# Altium PCB PCB.PcbDoc
Units mm, origin at the board's own origin, x right, y up, seen from the top; angles counter-clockwise.
Board outline 10.67 x 10.41 mm, 2 copper layers (Top Layer, Bottom Layer); 8 components, 8 nets, 30 pads, 0 vias.
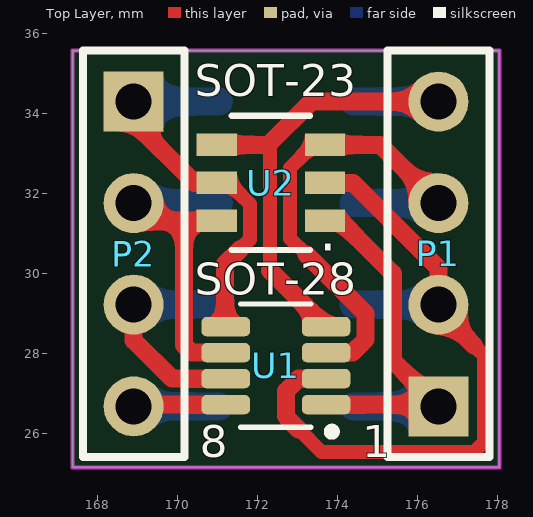
[diagram p0: Top Layer view]
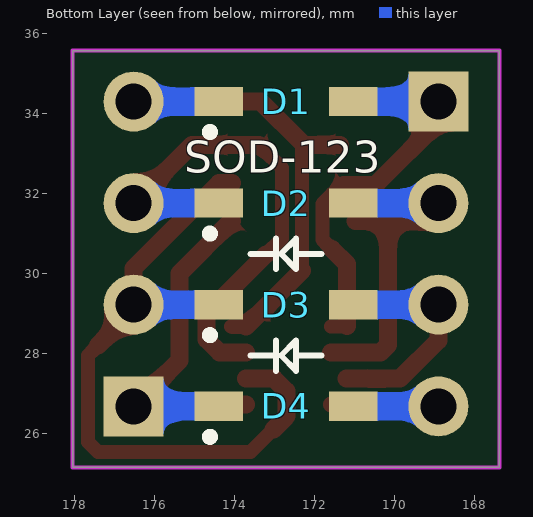
[diagram p1: Bottom Layer view, seen from below]
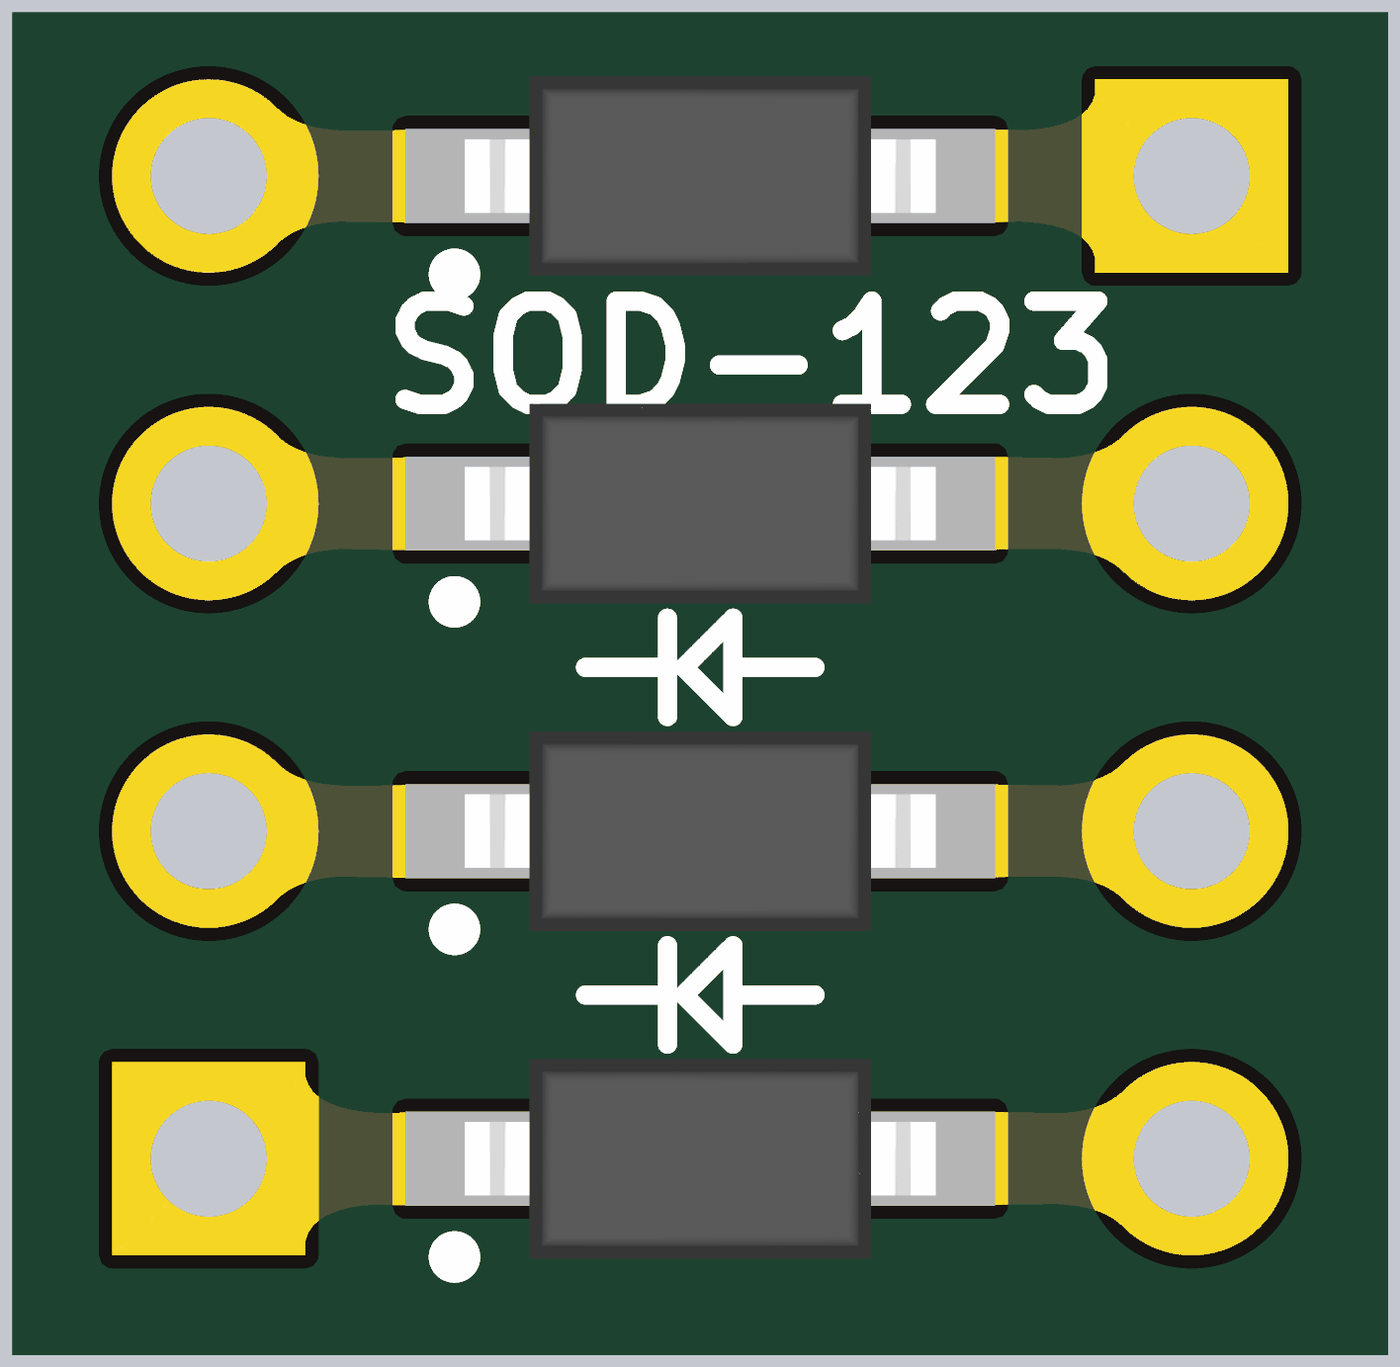
[diagram p2: 3D render of the assembled board from below, using the file's embedded part models]

## Layer stack, top to bottom
Top Solder: solder mask 0.0102, Solder Resist, Dk 3.5
Top Layer: signal copper 0.0356
Dielectric 1: dielectric 0.32, FR-4, Dk 4.8
Bottom Layer: signal copper 0.0356
Bottom Solder: solder mask 0.0102, Solder Resist, Dk 3.5

## Board outline
167.386,35.56 178.054,35.56 178.054,25.146 167.386,25.146

## Design rules (kind name [scope] priority, off if disabled: settings)
Clearance [All] p1: gap=0.152 ignorepadtopadclearanceinfootprint=FALSE except(0: Arc-Hole Track-Hole SMDPad-Hole THPad-Hole Via-Hole Fill-Hole Poly-Hole Region-Hole Text-Hole)
HoleSize [All] p1: absolutevalues=TRUE maxlimit=3 minlimit=0.3 maxpercent=80.000 minpercent=20.000
PolygonConnect [All] p1: connectstyle=Relief reliefconductorwidth=0.254 reliefentries=4 polygonreliefangle="90 Angle" airgapwidth=0.254
RoutingVias [All] p1: holewidth=0.3 width=0.6 viastyle="Through Hole" minholewidth=0.3 minwidth=0.5 maxholewidth=1 maxwidth=5
SolderMaskExpansion [All] p1: expansion=0.102
Width [All] p1: maxlimit=25.4 minlimit=0.152 preferedwidth=0.152
29 further rules are at their usual default settings.

## Components (designator, comment, footprint, x,y, rotation, side; value= is the part's Value field where it differs from the comment)
D1 "1N5819HW-7-F" SOD3715X145N 172.72,34.29 r180 bottom
D2 "1N5819HW-7-F" SOD3715X145N 172.72,31.75 r180 bottom
D3 "1N5819HW-7-F" SOD3715X145N 172.72,29.21 r180 bottom
D4 "1N5819HW-7-F" SOD3715X145N 172.72,26.67 r180 bottom
P1 "Header 4" HDR1X4 176.53,26.67 r90 top locked
P2 "Header 4" HDR1X4 168.91,34.29 r270 top
U1 "MAX11600EKAT" SOT65P280X145-8N 172.466,27.686 r180 top
U2 "AP3445LW6-7" SOT26_AP3445_DIO 172.339,32.258 r180 top

## Footprints (in the part's own frame and the unit in brackets; to place one, negate y for a bottom-side part, rotate by r counter-clockwise, add the part's x,y. Pads: shape width x height; smd on the part's side, far side on the other; paste and mask are expansions set on the pad)
HDR1X4 [mm] "Connector; Header; 4 Position"
  rect 1.5x1.5 hole 0.9: 1(0,0)
  round 1.5 hole 0.9: 2(2.54,0) 3(5.08,0) 4(7.62,0)
  silkscreen extent -1.27,-1.27 8.89,1.27
SOD3715X145N [mm]
  rect 1.21x0.73 smd: A(1.68,0) C(-1.68,0)
  silkscreen extent -2,-0.86 -1.81,-0.66, body extent -1.83,-0.77 1.83,0.77, height 1.5
SOT26_AP3445_DIO [mil]
  rect 39.5x22 smd paste+0 mask+0: 1(-53.25,37.4) 2(-53.25,0) 3(-53.25,-37.4) 4(53.25,-37.4) 5(53.25,0) 6(53.25,37.4)
  silkscreen extent -39,-66 39,66, body extent -59,-61 59,61, height 55
SOT65P280X145-8N [mm]
  rrect50% 1.21x0.48 smd: 1(-1.255,0.975) 2(-1.255,0.325) 3(-1.255,-0.325) 4(-1.255,-0.975) 5(1.255,-0.975) 6(1.255,-0.325) 7(1.255,0.325) 8(1.255,0.975)
  silkscreen extent -1.5,-1.54 0.88,1.75, body extent -1.4,-1.45 1.4,1.45, height 1.45

## Part data
D1 D2 D3 D4: "Diode Schottky 40 V 1A Surface Mount SOD-123", Package="SOD-123 Fairchild Semiconductor", Availability="In Stock", Check_prices=https://www.snapeda.com/parts/1N5819HW-7-F/Diodes+Inc./view-part/?ref=eda, MF="Diodes Inc.", MP=1N5819HW-7-F, Price=None, Purchase-URL=https://pricing.snapeda.com/search/part/1N5819HW-7-F/?ref=eda, SnapEDA_Link=https://www.snapeda.com/parts/1N5819HW-7-F/Diodes+Inc./view-part/?ref=snap
P1 P2: "Header, 4-Pin", LatestRevisionDate=17-Jul-2002, LatestRevisionNote="Re-released for DXP Platform.", Publisher="Altium Limited"
U1: "8 Bit Analog to Digital Converter 2, 4 Input 1 SAR SOT-23-8", Package="SOT-8 Maxim", Availability="In Stock", Check_prices=https://www.snapeda.com/parts/MAX11600EKA+T/Maxim%20Integrated/view-part/609916/?ref=eda, MF="Maxim Integrated", MP=MAX11600EKA+T, Price=None, Purchase-URL=https://pricing.snapeda.com/search/part/MAX11600EKA+T/?ref=eda, SnapEDA_Link=https://www.snapeda.com/parts/MAX11600EKA+T/Maxim%20Integrated/view-part/609916/?ref=snap
U2: "No Description Available", Mfr_Name="Diodes Inc", Copyright="Copyright (C) 2024 Ultra Librarian. All rights reserved.", Manufacturer_Part_Number=AP3445LW6-7, RefDes=RefDes, Type=DEV

## Nets (pads, with @x,y where several pads share a name; then routed paths per layer and width w, separated by ;. In a path a pad name is that pad's centre, name@x,y a point inside that pad or via, vN(x,y) a via of type N, cw(c..) or ccw(c..) an arc to the next point about the centre after c; other vN are vias at no path point)
1: D4.C P1.1 U1.1 U2.1 | length 10.6
  Top Layer w0.4: P1.1@176.489,26.711 P1.1
  Top Layer w0.45: U1.1 176.489,26.711 175.387,27.813 175.387,29.994 U2.1@174.073,31.308
  Bottom Layer w0.7: D4.C P1.1
2: D3.C P1.2 U1.2 U2.2 | length 17.5
  Top Layer w0.35: 173.036,26.1 173.609,25.527 177.419,25.527 177.673,25.781 177.673,27.94 177.419,28.194
  Top Layer w0.45: 173.03,26.094 172.739,26.385 172.739,26.397 172.714,26.422 172.714,27.047 173.027,27.361 U1.2 ; U2.2@174.073,32.258 174.392,32.258 176.53,30.12 P1.2 176.53,29.083 177.419,28.194
  Bottom Layer w0.7: D3.C P1.2
3: D2.C P1.3 U1.3 U2.3 | length 12.9
  Top Layer w0.35: 173.228,30.462 172.82,30.87 172.82,32.631 U2.3@173.397,33.208
  Top Layer w0.45: 173.228,30.462 174.703,28.987 174.703,28.335 174.379,28.011 U1.3 ; U2.3@173.397,33.208 U2.3 175.072,33.208 P1.3
  Bottom Layer w0.7: D2.C P1.3
4: D1.C P1.4 U1.4 U2.4 | length 13.3
  Top Layer w0.35: 172.273,33.208 172.318,33.163 172.318,30.064 ; U1.4 U1.4@174.102,28.661
  Top Layer w0.45: U2.4@171.367,33.208 172.273,33.208 173.355,34.29 P1.4 ; 172.318,30.064 U1.4
  Bottom Layer w0.7: D1.C P1.4
5: D1.A P2.1 U1.5 U2.5 | length 10.1
  Top Layer w0.35: P2.1@168.91,33.782 P2.1 ; 170.434,32.258 U2.5 171.281,32.258 171.816,31.723 171.816,30.846 171.577,30.607 ; U1.5@171.196,28.676 U1.5 U1.5@171.592,28.661
  Top Layer w0.45: P2.1@168.91,33.782 170.434,32.258 ; U1.5@171.196,28.676 171.196,30.226 171.577,30.607
  Bottom Layer w0.7: P2.1 D1.A
6: D2.A P2.2 U1.6 U2.6 | length 9
  Top Layer w0.45: P2.2 169.352,31.308 170.169,31.308 ; U2.6 170.169,31.308 ; U1.6@171.592,28.011 U1.6 170.363,28.011 170.169,28.205 170.169,31.308
  Bottom Layer w0.4: P2.2 P2.2@168.914,31.746
  Bottom Layer w0.7: P2.2 D2.A
7: D3.A P2.3 U1.7 | length 5.7
  Top Layer w0.45: P2.3 168.91,28.321 169.87,27.361 U1.7
  Bottom Layer w0.7: P2.3 D3.A
8: D4.A P2.4 U1.8 | length 4.8
  Top Layer w0.4: P2.4 P2.4@168.951,26.711 ; U1.8 U1.8@171.592,26.711
  Top Layer w0.45: P2.4@168.951,26.711 U1.8
  Bottom Layer w0.7: P2.4 D4.A

## Keep-outs
Keep-Out Layer:
  the board outline again, w0.1

## Silkscreen, mask and mechanical layers (free items; w line width, h text height)
Top Overlay:
  text "SOT-23" at 170.434,34.417 h0.8
  text "SOT-28" at 170.434,29.464 h0.8
  text "8" at 170.561,25.4 h0.8
  text "1" at 174.625,25.4 h0.8
Bottom Overlay:
  lines w0.15: 171.831,27.94 172.466,27.94 ; 171.831,30.48 172.466,30.48 ; 172.974,27.94 173.609,27.94 ; 172.974,30.48 173.609,30.48 ; 172.974,27.559 172.974,28.321 ; 172.974,27.559 172.974,28.321 ; 172.974,27.559 172.974,28.321 ; 172.974,30.099 172.974,30.861 ; 172.974,30.099 172.974,30.861 ; 172.974,30.099 172.974,30.861 ; 172.466,27.559 172.466,28.321 172.847,27.94 172.466,27.559 ; 172.466,30.099 172.847,30.48 172.466,30.861 172.466,30.099
  text "SOD-123" at 175.26,32.512 h0.8

## Text inside footprints (layer, text, board x,y; h text height)
U2: Mechanical 13 "*" at 173.126,32.055 h1.27 r180